# Altium PCB TDA 2050 - 32W DON.PcbDoc
Units mm, origin at the board's own origin, x right, y up, seen from the top; angles counter-clockwise.
Board outline 50.29 x 46.1 mm, 2 copper layers (Top Layer, Bottom Layer); 25 components, 15 nets, 56 pads, 4 vias.
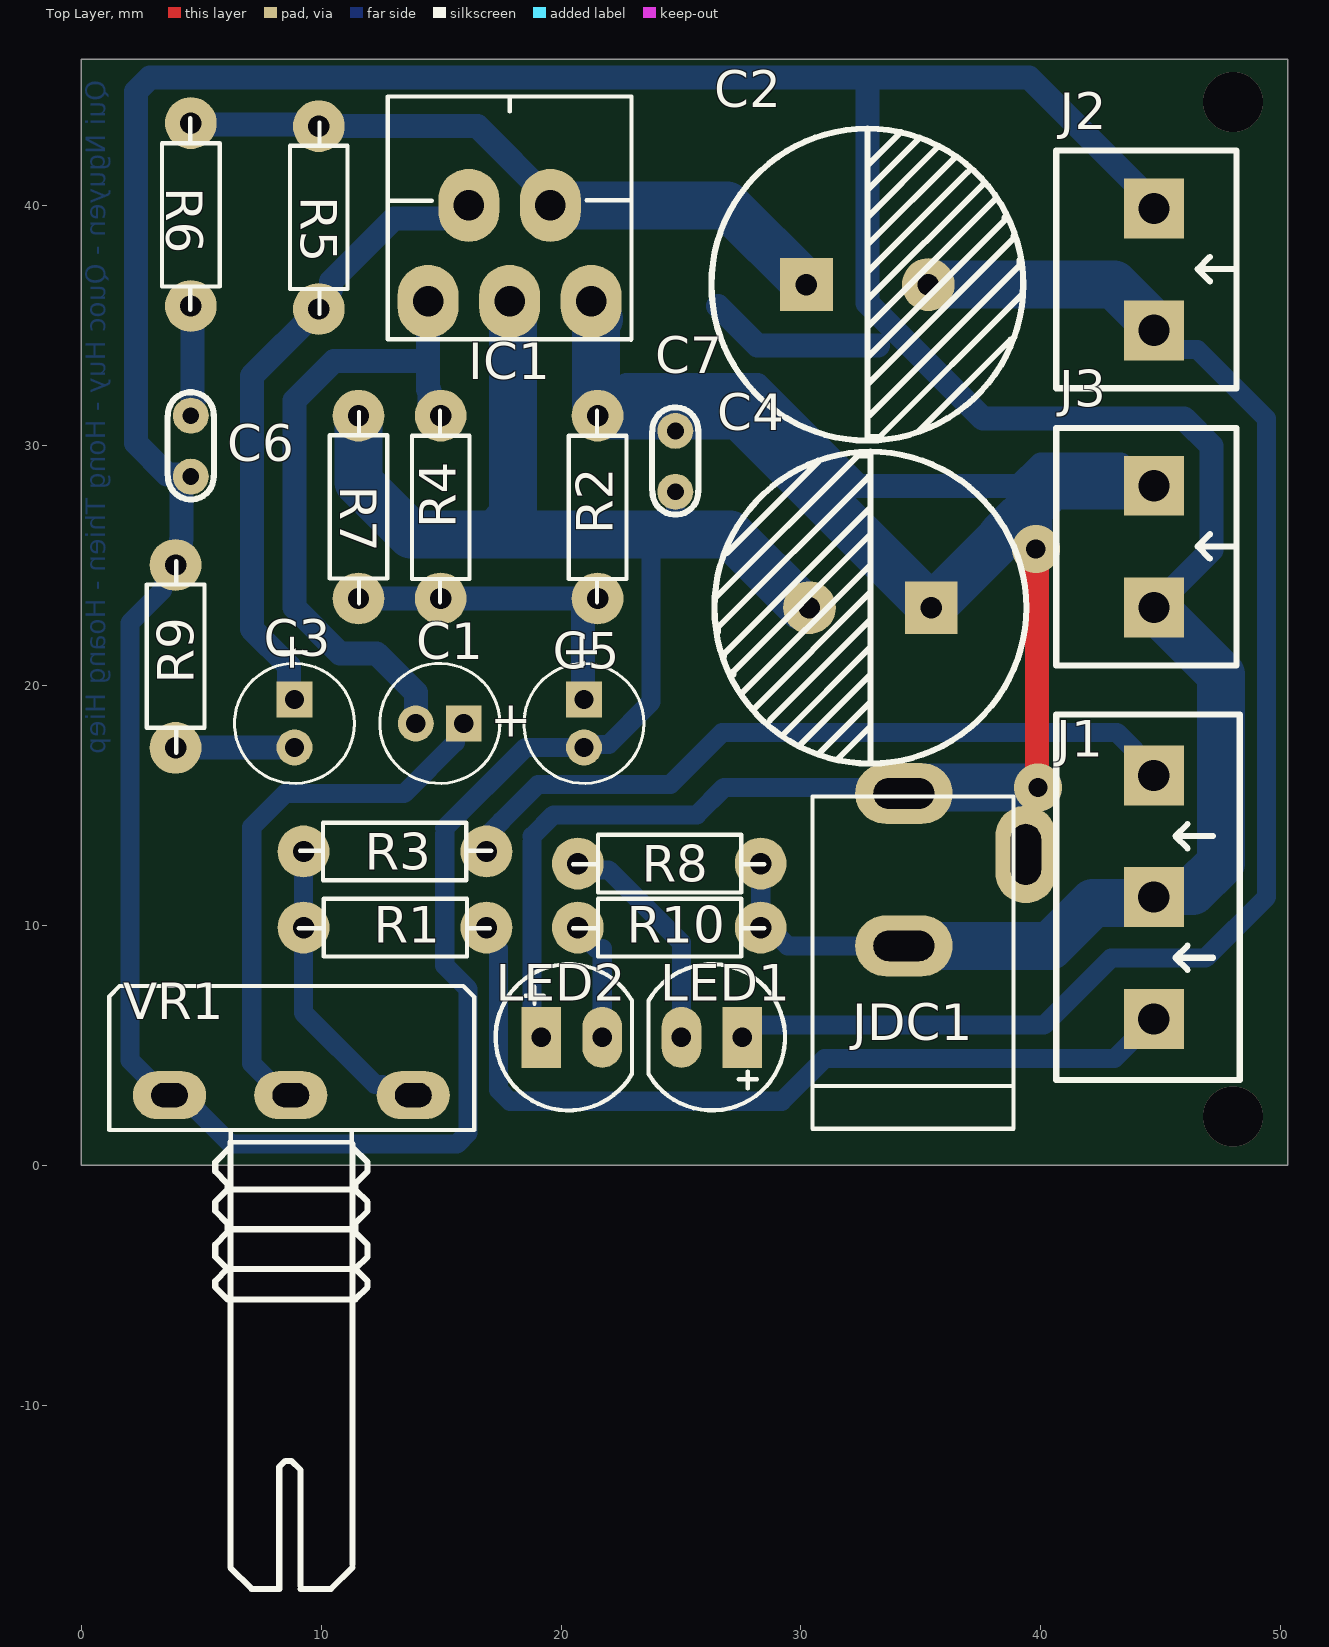
[diagram p0: Top Layer view]
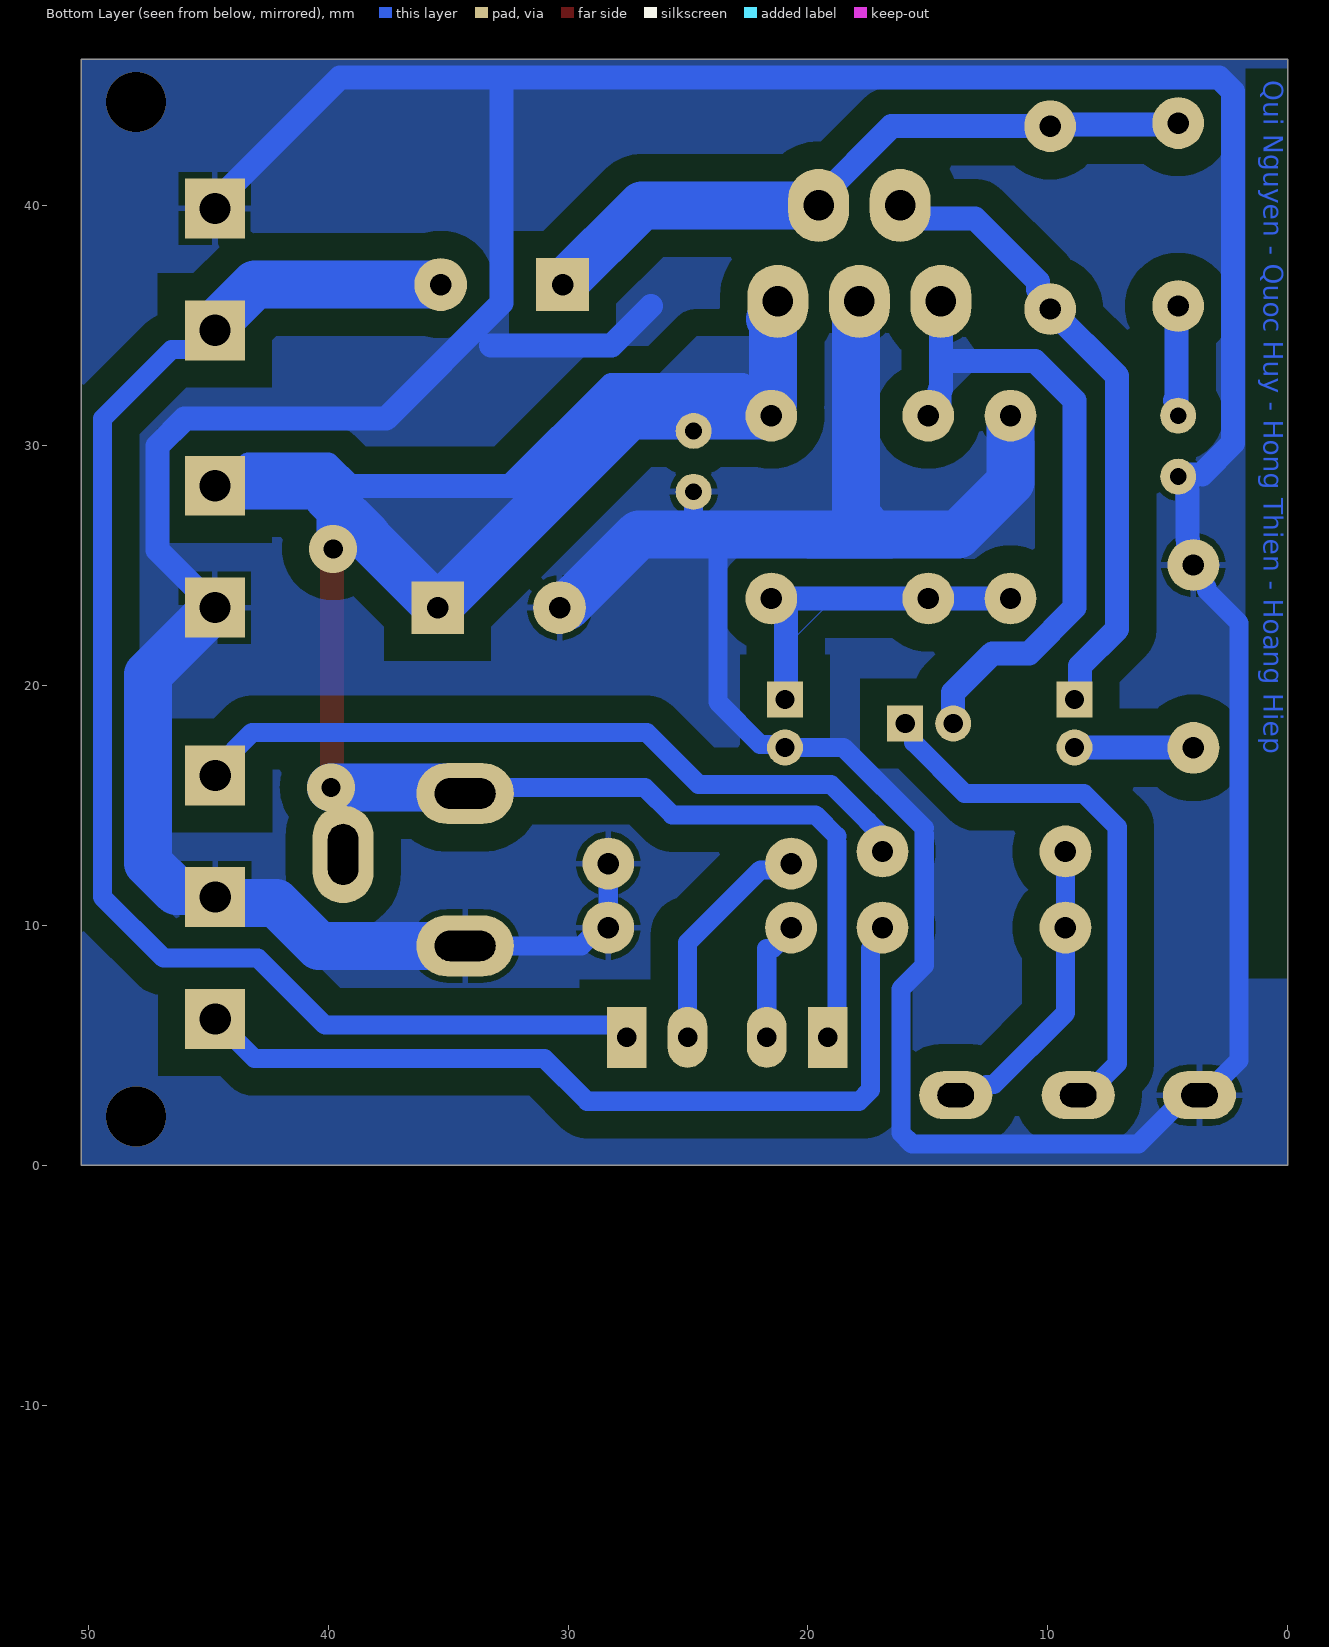
[diagram p1: Bottom Layer view, seen from below]
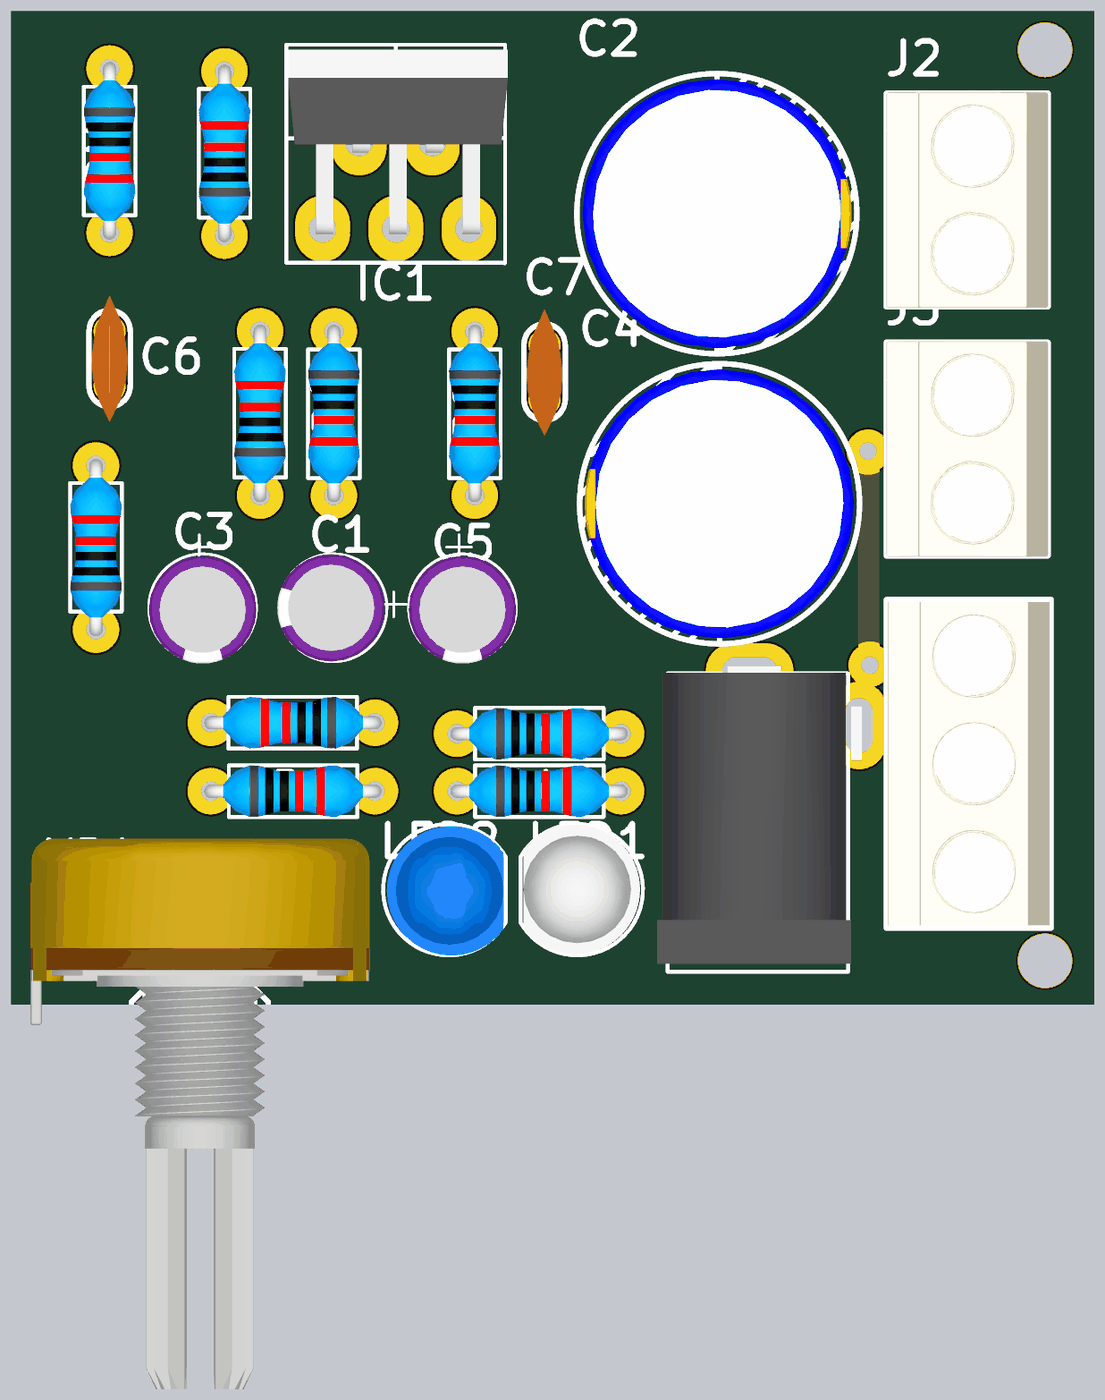
[diagram p2: 3D render of the assembled board from above, using the file's embedded part models]

## Layer stack, top to bottom
Top Solder: solder mask 0.0102, Solder Resist, Dk 3.5
Top Layer: signal copper 0.0356
Dielectric 1: dielectric 0.32, FR-4, Dk 4.8
Bottom Layer: signal copper 0.0356
Bottom Solder: solder mask 0.0102, Solder Resist, Dk 3.5

## Board outline
0,0 50.292,0 50.292,46.101 0,46.101

## Design rules (kind name [scope] priority, off if disabled: settings)
Clearance [All] p1: gap=0.254 ignorepadtopadclearanceinfootprint=FALSE except(0: Arc-Hole Track-Hole SMDPad-Hole THPad-Hole Via-Hole Fill-Hole Poly-Hole Region-Hole Text-Hole; 1.143: Arc-Fill Arc-Poly Arc-Region Track-Fill Track-Poly Track-Region SMDPad-Fill SMDPad-Poly SMDPad-Region THPad-Fill THPad-Poly THPad-Region Via-Fill Via-Poly Via-Region Fill-Fill Fill-Poly Fill-Region Poly-Poly Poly-Region Region-Region)
PolygonConnect [All] p1: connectstyle=Relief reliefconductorwidth=0.254 reliefentries=4 polygonreliefangle="90 Angle" airgapwidth=0.254
RoutingVias [All] p1: holewidth=0.711 width=1.27 viastyle="Through Hole" minholewidth=0.711 minwidth=1.27 maxholewidth=0.711 maxwidth=1.27
SolderMaskExpansion [All] p1: expansion=0.102 istentingtop=FALSE
Width [All] p1: maxlimit=2 minlimit=0.8 preferedwidth=1
30 further rules are at their usual default settings.

## Components (designator, comment, footprint, x,y, rotation, side; value= is the part's Value field where it differs from the comment)
C1 "2.2uF" CA-ALU-5 14.946,18.415 r180 top value=104
C2 "1000uF" "tu hoa 13mm" 32.766,36.703 r0 top
C3 "22uF" CA-ALU-5 8.89,18.415 r270 top value=104
C4 "1000uF" "tu hoa 13mm" 32.893,23.241 r180 top
C5 "100uF" CA-ALU-5 20.955,18.415 r270 top value=104
C6 "474" "tu gom" 4.572,29.972 r270 top
C7 "104" "tu gom" 24.765,29.337 r270 top
IC1 "TDA2050" DIP5 17.858,38.005 r0 top value=TDA2030
J1 "KF3" KF3-5.08 44.704,6.096 r90 top
J2 "KF2" KF2-5.08 44.717,37.338 r270 top
J3 "KF2" KF2-5.08 44.717,25.781 r270 top
JDC1 "Jac DC" DC0 36.83,12.319 r90 top
LED1 "LED" LED-5-RED 27.559,5.334 r180 top value="LED 3 ly Single Colour"
LED2 "LED" LED-5-BLUE 20.32,5.334 r0 top value="LED 3 ly Single Colour"
R1 "2k2" RES-1/4W-SMALL 12.827,9.906 r0 top
R2 "22K" RES-1/4W-SMALL 21.526,27.686 r270 top
R3 "2k2" RES-1/4W-SMALL 13.335,13.081 r180 top
R4 "22K" RES-1/4W-SMALL 14.986,27.686 r270 top
R5 "22K" RES-1/4W-SMALL 9.906,39.243 r90 top
R6 "2.2" RES-1/4W-SMALL 4.572,39.878 r270 top
R7 "22K" RES-1/4W-SMALL 11.557,27.178 r90 top
R8 "2K2" RES-1/4W-SMALL 24.257,12.573 r0 top
R9 "680" RES-1/4W-SMALL 3.937,20.955 r90 top
R10 "2k2" RES-1/4W-SMALL 24.257,9.906 r0 top
VR1 "50K" VR-S1 8.763,2.921 r0 top value="Volume 50k"

## Footprints (in the part's own frame and the unit in brackets; to place one, negate y for a bottom-side part, rotate by r counter-clockwise, add the part's x,y. Pads: shape width x height; smd on the part's side, far side on the other; paste and mask are expansions set on the pad)
CA-ALU-5 [mm] "Polarized capacitors, Aluminum Electrolytic Capacitors, 2-Leads, Body 5x11x2x0.5"
  rect 1.5x1.5 hole 0.8: 1(-1,0)
  round 1.5 hole 0.8: 2(1,0)
  silkscreen extent -2.5,-2.5 2.5,2.5, body extent -2.41,-2.5 2.59,2.5, height 11
DC0 [mil] "Jac DC input"
  oval 100x160 hole 50 slot 100 at 90 deg: 1(125,100) 2(-125,100)
  oval 160x100 hole 50 slot 100 at 0 deg: 3(25,-100)
  silkscreen extent -425,-80 120,250, body extent -410,-105 134,269, height 434
DIP5 [mm]
  oval 2.54x3.048 hole 1.27: 1(-3.4,-2) 2(-1.7,2) 3(0,-2) 4(1.7,2) 5(3.4,-2)
  silkscreen extent -5.08,-3.61 5.08,6.53, body extent -4.99,-2.25 5.21,6.31, height 18.81
KF2-5.08 [mm]
  rect 2.5x2.5 hole 1.3: 1(-2.54,0) 2(2.54,0)
  silkscreen extent -4.95,-4.08 4.95,3.43, body extent -5,-4.07 5,3.43, height 10
KF3-5.08 [mm]
  rect 2.5x2.5 hole 1.3: 1(0,0) 2(5.08,0) 3(10.147,0)
  silkscreen extent -2.54,-3.58 12.7,4.06, body extent -2.42,-3.51 12.58,3.99, height 10
LED-5-BLUE [mil] "LED 2 PIN, 5 ly , Only colour, pin to pin 110mil"
  rect 65x100 hole 32: 1(-45,0)
  oval 65x100 hole 32: 2(55,0)
  silkscreen extent -120,-120 104,120, body extent -113,-120 100,117, height 339
LED-5-RED [mil] "LED 2 PIN, 5 ly , Only colour,pin to pin 100mil"
  rect 65x100 hole 32: 1(0,0)
  oval 65x100 hole 32: 2(100,0)
  silkscreen extent -70,-120 154,120, body extent -65,-119 149,118, height 339
RES-1/4W-SMALL [mil]
  round 85 hole 35: 1(-140,0) 2(160,0)
  silkscreen extent -148,-47 166,47, body extent -152,-47 172,47, height 97
"tu gom" [mm] "Tu gom mini"
  round 1.5 hole 0.7: 1(-1.27,0) 2(1.27,0)
  silkscreen extent -2.25,-0.97 2.22,0.97, body extent -2.92,-0.85 2.92,0.85, height 6.12
"tu hoa 13mm" [mm]
  rect 2.2x2.2 hole 0.9: 1(-2.54,0)
  round 2.2 hole 0.9: 2(2.54,0)
  silkscreen extent -6.5,-6.5 6.5,6.5, body extent -6.25,-6.25 6.26,6.25, height 23.02
VR-S1 [mil]
  oval 120x78.74 hole 40 slot 60 at 0 deg: 1(-200,0) 2(-1,0) 3(200,0)
  silkscreen extent -299,-810 300,179, body extent -310,-818 310,188, height 839

## Part data
C1 C3 C5: library part CN-ALU-DIP, "Capacitor (Semiconductor SIM Model)", LatestRevisionDate=17-Jul-2002, LatestRevisionNote="Re-released for DXP Platform.", PackageReference=C1206, Publisher="Altium Limited"
C2 C4: library part "Tu Hoa 1000uF 50V 13x26", "Cắm", Chung_Loai=Cắm, Don_Vi=Con, Ma_Hang=MH006619, So_Chan=2, Ten_Linh_Kien="Tụ Hóa 1000uF 50V"
C6 C7: library part "Tu gom 104 50V", "Cắm", Chung_Loai=Cắm, Don_Vi=Con, Ma_Hang=MH004761, So_Chan=2, Ten_Linh_Kien="Tụ gốm 104 100nF 50V"
J1: Manufacturer="Würth Elektronik eiSos GmbH", partNo=691103110003, ComponentLink1 Description=Manufacturer, ComponentLink1URL=http://www.we-online.com, ComponentLink2 Description=Datasheet, ComponentLink2URL=http://katalog.we-online.de/em/datasheet/6911031100xx.pdf, Created by="Karrer Zheng", Created Date="29 October 2013", NoPins=3
J2 J3: Manufacturer="Würth Elektronik eiSos GmbH", partNo=691103110002, ComponentLink1 Description=Manufacturer, ComponentLink1URL=http://www.we-online.com, ComponentLink2 Description=Datasheet, ComponentLink2URL=http://katalog.we-online.de/em/datasheet/6911031100xx.pdf, Created by="Karrer Zheng", Created Date="29 October 2013", NoPins=2
JDC1: library part DCIN, "Jac DC input"
LED1 LED2: "LED Single colour Green and Red"
R1 R2 R3 R4 R5 R6 R7 R8 R9 R10: library part Res, "Res", Manufacturer="Generic Components", Class=Passive, Published=08/06/2000, Publisher="Altium Hobart Technology Centre", SubClass=R
VR1: library part VR-S, "Var Resistor"

## Via types
v1: diameter 2.5, hole 2.5, Top Layer to Bottom Layer, 2 vias
v2: diameter 2, hole 0.8, Top Layer to Bottom Layer, 2 vias

## Nets (pads, with @x,y where several pads share a name; then routed paths per layer and width w, separated by ;. In a path a pad name is that pad's centre, name@x,y a point inside that pad or via, vN(x,y) a via of type N, cw(c..) or ccw(c..) an arc to the next point about the centre after c; other vN are vias at no path point)
+12: C4.1 C7.1 IC1.5 J3.1 JDC1.1 JDC1.3 LED2.1 R2.1 | length 97.6
  Top Layer w1: v2(39.787,25.69) 39.833,25.645 39.833,15.793 v2(39.878,15.748)
  Bottom Layer w0.8: 18.796,13.462 18.796,5.715 LED2.1 ; 18.796,13.716 19.685,14.605 25.654,14.605 26.797,15.748 JDC1.1@34.036,15.748
  Bottom Layer w1: 22.733,32.512 28.194,32.512 32.385,28.321 39.116,28.321 40.005,29.21 43.307,29.21 ; v2(39.787,25.69) 39.978,25.881 39.978,27.833 40.467,28.321
  Bottom Layer w2: IC1.5 21.258,35.605 IC1.5@21.59,35.273 ; R2.1@21.463,31.73 IC1.5@21.463,34.765 ; R2.1 27.432,31.242 C4.1 38.361,26.169 38.361,26.216 39.978,27.833 ; JDC1.1@34.036,15.748 v2(39.878,15.748) ; 40.467,28.321 J3.1
GND: C4.2 C5.2 C6.2 C7.2 IC1.3 J1.2 J2.1 J3.2 JDC1.2 R7.2 R8.2 R9.2 R10.2 VR1.1 | length 246.8
  Bottom Layer w0.8: R9.2 3.937,24.651 3.379,24.093 3.379,23.953 2.032,22.606 2.032,4.373 3.484,2.921 4.207,2.921 6.239,0.889 15.66,0.889 16.129,1.358 16.129,7.351 15.157,8.322 15.157,13.799 ; 15.157,14.053 18.519,17.415 C5.2 21.081,17.541 21.986,17.541 23.749,19.304 23.749,26.289 ; 24.765,26.289 C7.2 ; R8.2@28.321,12.954 R10.2 28.689,9.906 29.451,9.144 JDC1.2@34.036,9.144
  Bottom Layer w1: R9.2 4.159,25.241 4.159,26.06 4.191,26.093 4.191,28.186 4.572,28.567 C6.2 4.476,28.798 3.587,28.798 2.286,30.099 2.286,44.753 2.872,45.339 32.766,45.339 ; 26.543,35.814 28.194,34.163 33.217,34.163 ; J3.2 47.117,25.641 47.117,29.972 45.974,31.115 37.592,31.115 32.766,35.941 32.766,45.339 ; J2.1@44.958,39.878 39.497,45.339 32.766,45.339
  Bottom Layer w2: R7.2 11.561,31.238 11.561,28.477 13.748,26.289 17.245,26.289 ; IC1.3 17.961,35.902 17.961,35.266 18.007,35.22 18.007,27.051 17.245,26.289 ; C4.2 30.315,23.279 30.061,23.279 27.051,26.289 24.765,26.289 23.749,26.289 17.245,26.289 ; JDC1.2@34.036,9.144 40.386,9.144 42.168,10.926 44.454,10.926 44.954,11.426 46.326,11.426 47.498,12.598 47.498,20.206 ; J3.2 47.498,20.46
  other v1: 48.006,2.032 48.006,44.308
INPUT: R1.1 R3.2 VR1.3 | length 12.7
  Bottom Layer w0.8: R3.2 9.271,6.35 12.254,3.367 12.548,3.367 12.994,2.921 VR1.3
NetC1_1: C1.1 VR1.2 | length 22.9
  Bottom Layer w0.8: VR1.2 8.435,2.921 7.112,4.244 7.112,14.097 8.509,15.494 13.462,15.494 15.596,17.628 15.596,18.065 C1.1
NetC1_2: C1.2 IC1.1 R4.1 | length 27.6
  Bottom Layer w1: C1.2 13.946,19.709 12.319,21.336 10.795,21.336 8.89,23.241 8.89,31.877 10.541,33.528 14.325,33.528 14.458,33.661 ; IC1.1 14.458,33.661 ; R4.1@14.51,31.169 14.51,32.283 14.458,32.336 14.458,33.661
NetC2_1: C2.1 IC1.4 R5.2 R6.1 | length 28.6
  Bottom Layer w1: R6.1 4.635,43.37 9.842,43.37 R5.2 16.51,43.307 19.558,40.259 IC1.4
  Bottom Layer w2: IC1.4 26.924,40.005 C2.1
NetC2_2: C2.2 J2.2 LED1.1 | length 59.8
  Bottom Layer w0.8: 28.448,5.842 40.132,5.842 42.926,8.636 46.863,8.636 49.403,11.176 49.403,31.115 46.517,34.001 45.514,34.001 J2.2
  Bottom Layer w2: C2.2 43.053,36.703 J2.2@44.958,34.798
NetC3_1: C3.1 IC1.2 R5.1 | length 26.6
  Bottom Layer w1: C3.1 8.659,19.646 8.659,20.805 7.112,22.352 7.112,32.893 R5.1 9.906,36.001 10.412,36.507 10.412,36.828 13.04,39.456 15.609,39.456 IC1.2
NetC3_2: C3.2 R9.1 | length 5
  Bottom Layer w1: R9.1 3.945,17.407 8.882,17.407 C3.2
NetC5_1: C5.1 R2.2 R4.2 R7.1 | length 14.1
  Bottom Layer w1: R7.1 13.843,23.622 14.732,23.622 R2.2 R2.2@21.558,23.59 ; R2.2@20.923,23.463 20.923,19.447 C5.1
NetC6_1: C6.1 R6.2 | length 4
  Bottom Layer w1: R6.2 4.635,35.75 4.635,31.941 C6.1@4.699,31.877
NetJ1_1: J1.1 R1.2 | length 35.9
  Bottom Layer w0.8: R1.2 16.891,9.538 17.399,9.03 17.399,3.136 17.868,2.667 29.199,2.667 30.977,4.445 43.053,4.445 J1.1
NetJ1_3: J1.3 R3.1 | length 30.6
  Bottom Layer w0.8: R3.1@16.891,13.335 16.891,13.703 17.512,14.324 17.512,14.337 19.05,15.875 24.558,15.875 26.717,18.034 43.167,18.034 J1.3@44.704,16.497
NetLED1_2: LED1.2 R8.1 | length 9.6
  Bottom Layer w0.8: R8.1 20.961,12.313 21.977,12.313 25.019,9.271 LED1.2
NetLED2_2: LED2.2 R10.1 | length 5.7
  Bottom Layer w0.8: R10.1@20.32,9.538 R10.1@20.32,9.906 ; R10.1@20.32,10.173 21.463,9.03 ; LED2.2 21.717,9.03

## Polygon pours and split planes (outlines as drawn)
GND on Bottom Layer "GND_L02_P011" (solid, remove dead copper, pour order 11): 50.292,46.101 0,46.101 0,0 50.292,0
NetC5_1 on Bottom Layer "NETC5_1_L02_P010" (solid, remove dead copper, pour order 10): 19.177,23.622 19.177,23.368 20.574,21.971 21.526,22.924 21.526,23.622
NetC5_1 on Bottom Layer "NETC5_1_L02_P009" (solid, remove dead copper, pour order 9): 21.526,23.622 18.923,23.622 20.701,21.844
NetC1_2 on Bottom Layer "NETC1_2_L02_P006" (solid, remove dead copper, pour order 6): 14.458,36.005 14.458,31.77 12.827,33.401 12.573,33.401 12.827,33.655
+12 on Bottom Layer "+12_L02_P005" (solid, remove dead copper, pour order 5): 21.59,34.036 21.526,33.972 21.526,31.242 26.67,31.242 27.305,31.877 24.638,34.544 21.59,34.544
+12 on Bottom Layer "+12_L02_P003" (solid, remove dead copper, pour order 3): 21.717,33.909 21.717,31.623 23.749,31.623 24.003,31.877
+12 on Bottom Layer "+12_L02_P000" (solid, remove dead copper, pour order 0): 40.213,28.067 30.988,28.067 34.671,24.384 36.83,24.384 36.83,24.684

## Other copper
Bottom Layer:
  text "Qui Nguyen - Quoc Huy - Hong Thien - Hoang Hiep" at 1.003,45.212 h0.8 r90

## Text inside footprints (layer, text, board x,y; h text height)
C1: Top Overlay "+" at 18.771,19.152 h1.5 r180
C3: Top Overlay "+" at 8.153,22.24 h1.5 r270
C5: Top Overlay "+" at 20.218,22.24 h1.5 r270